# Altium PCB OnePhaseController.PcbDoc
Units mm, origin at the board's own origin, x right, y up, seen from the top; angles counter-clockwise.
Board outline 93 x 87.5 mm, 2 copper layers (Top Layer, Bottom Layer); 58 components, 35 nets, 154 pads, 21 vias.
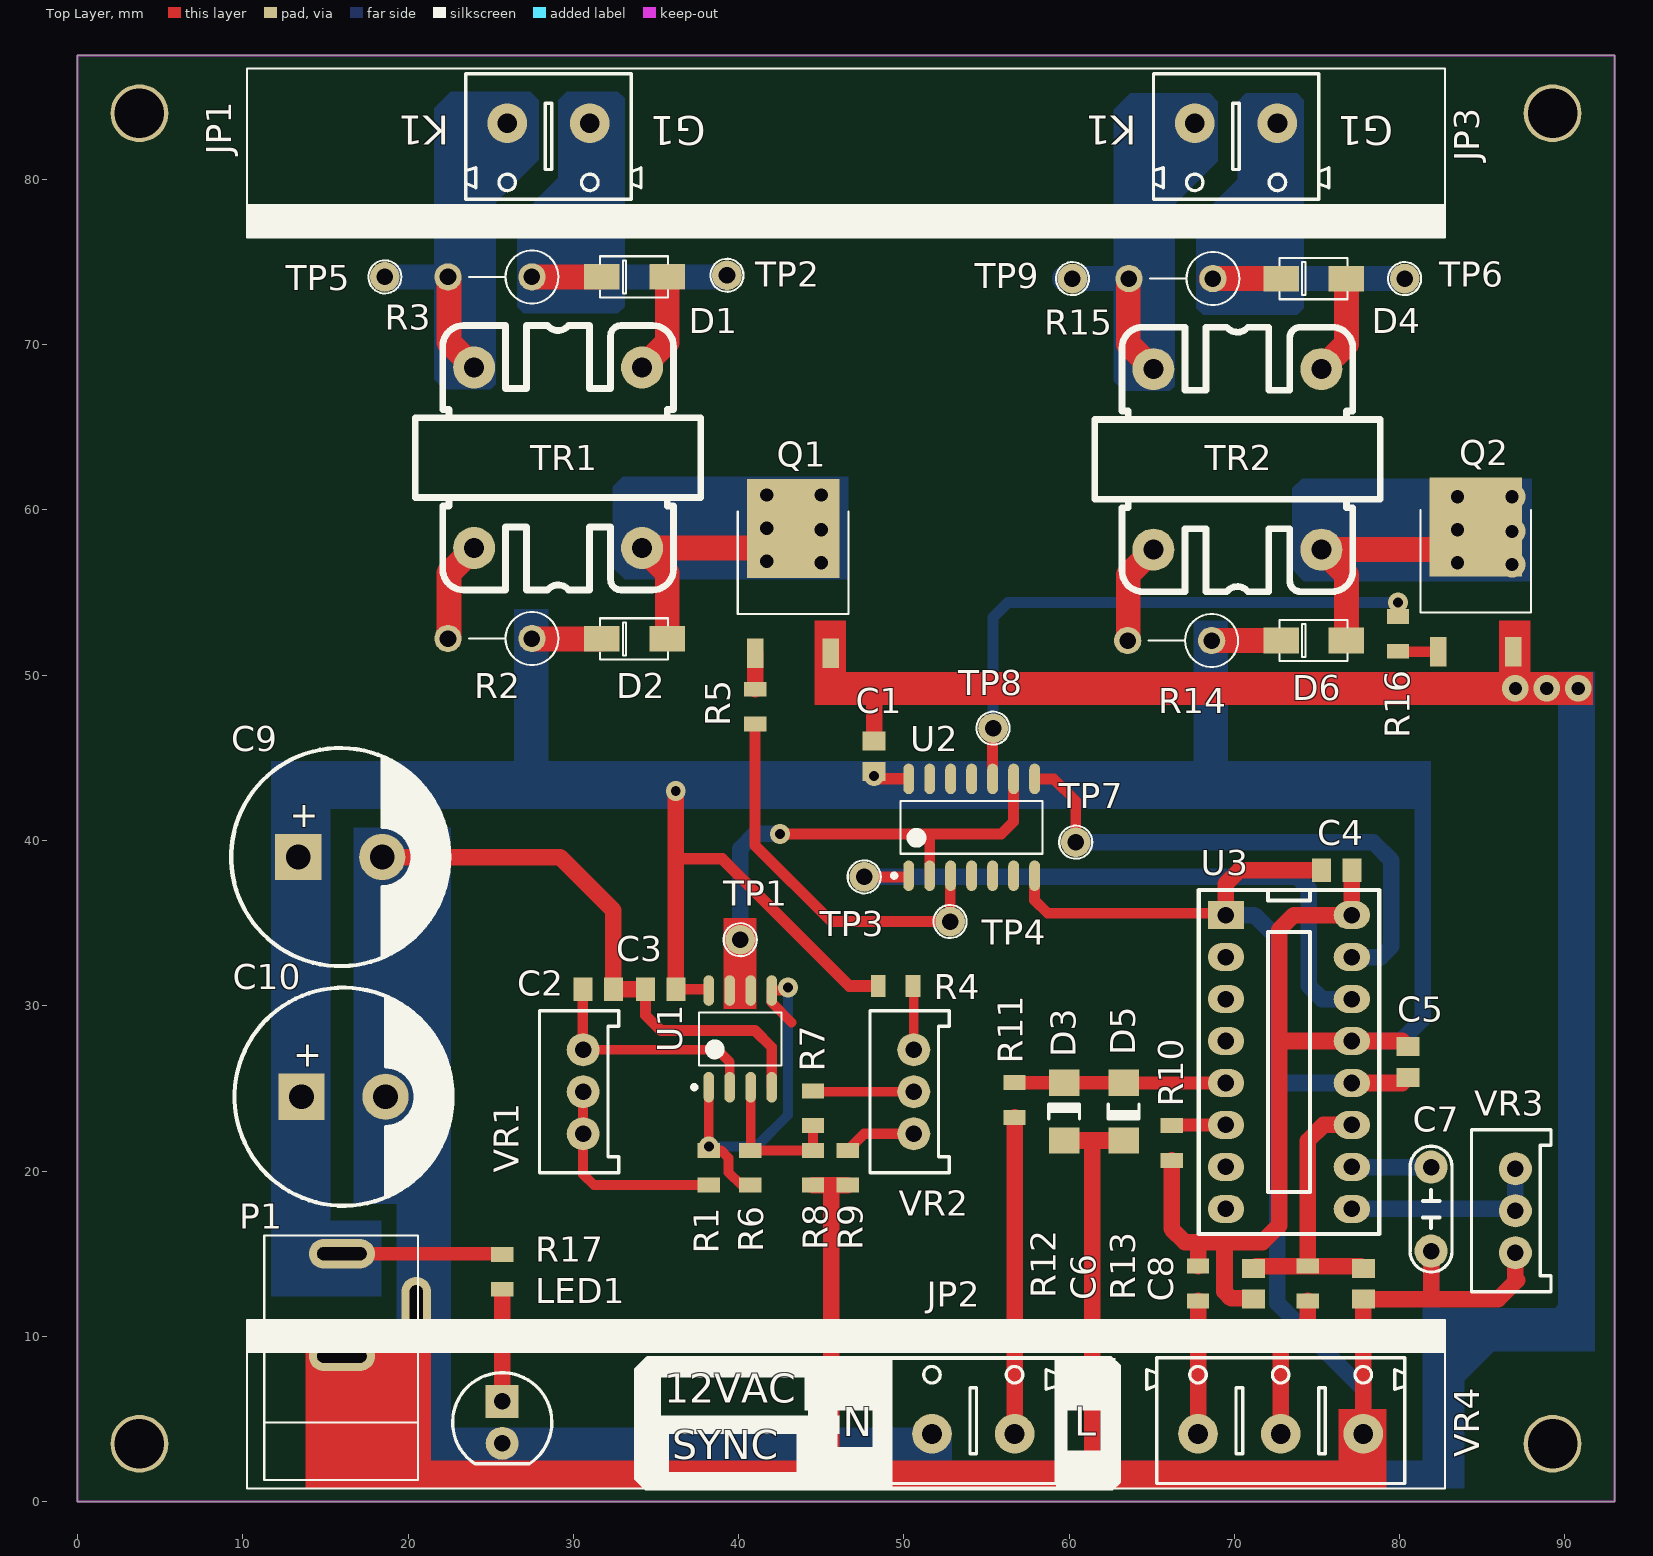
[diagram p0: Top Layer view]
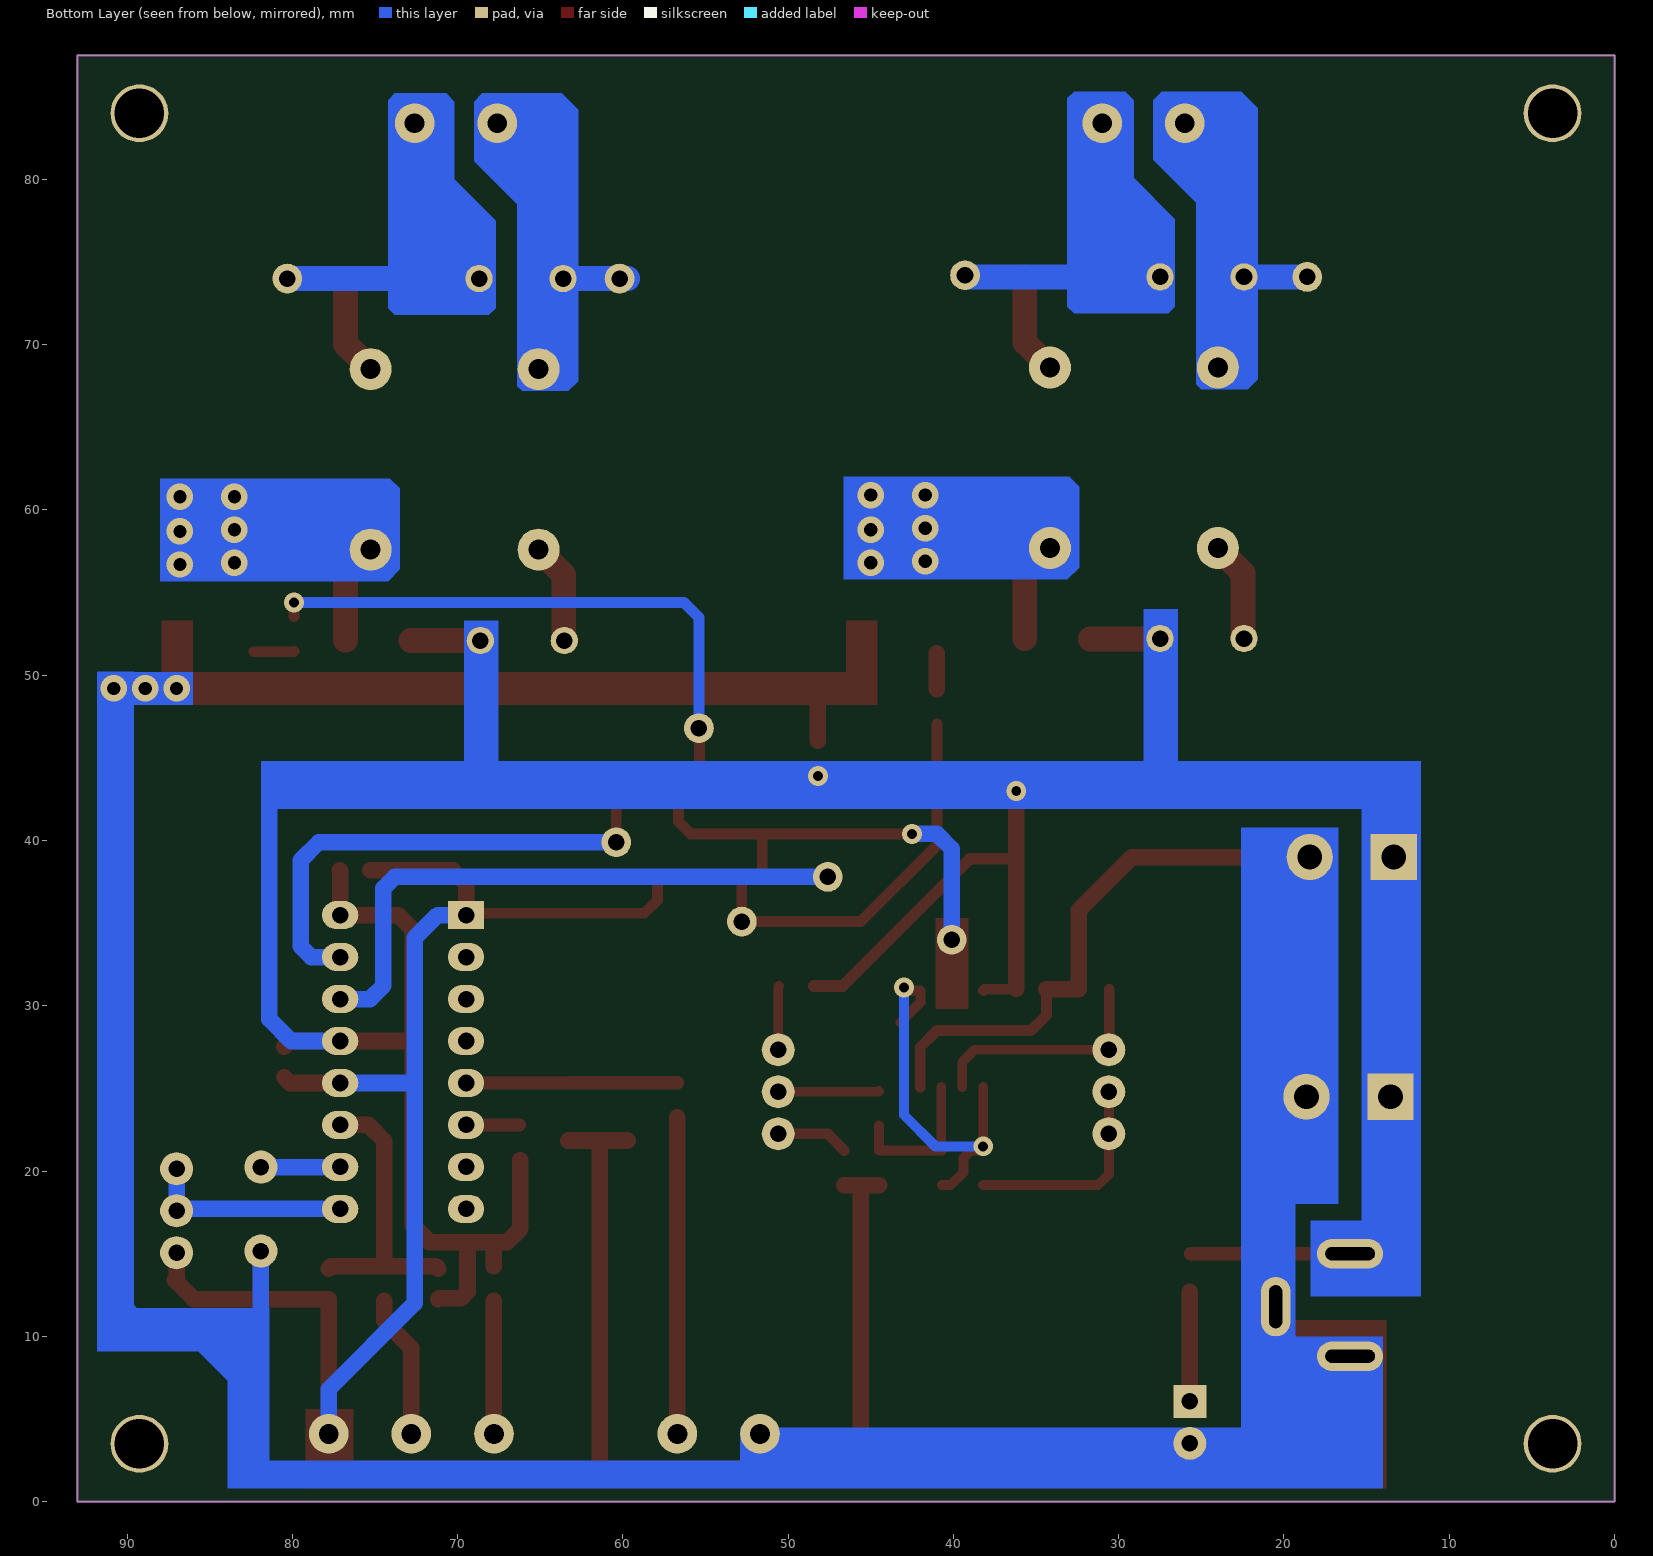
[diagram p1: Bottom Layer view, seen from below]
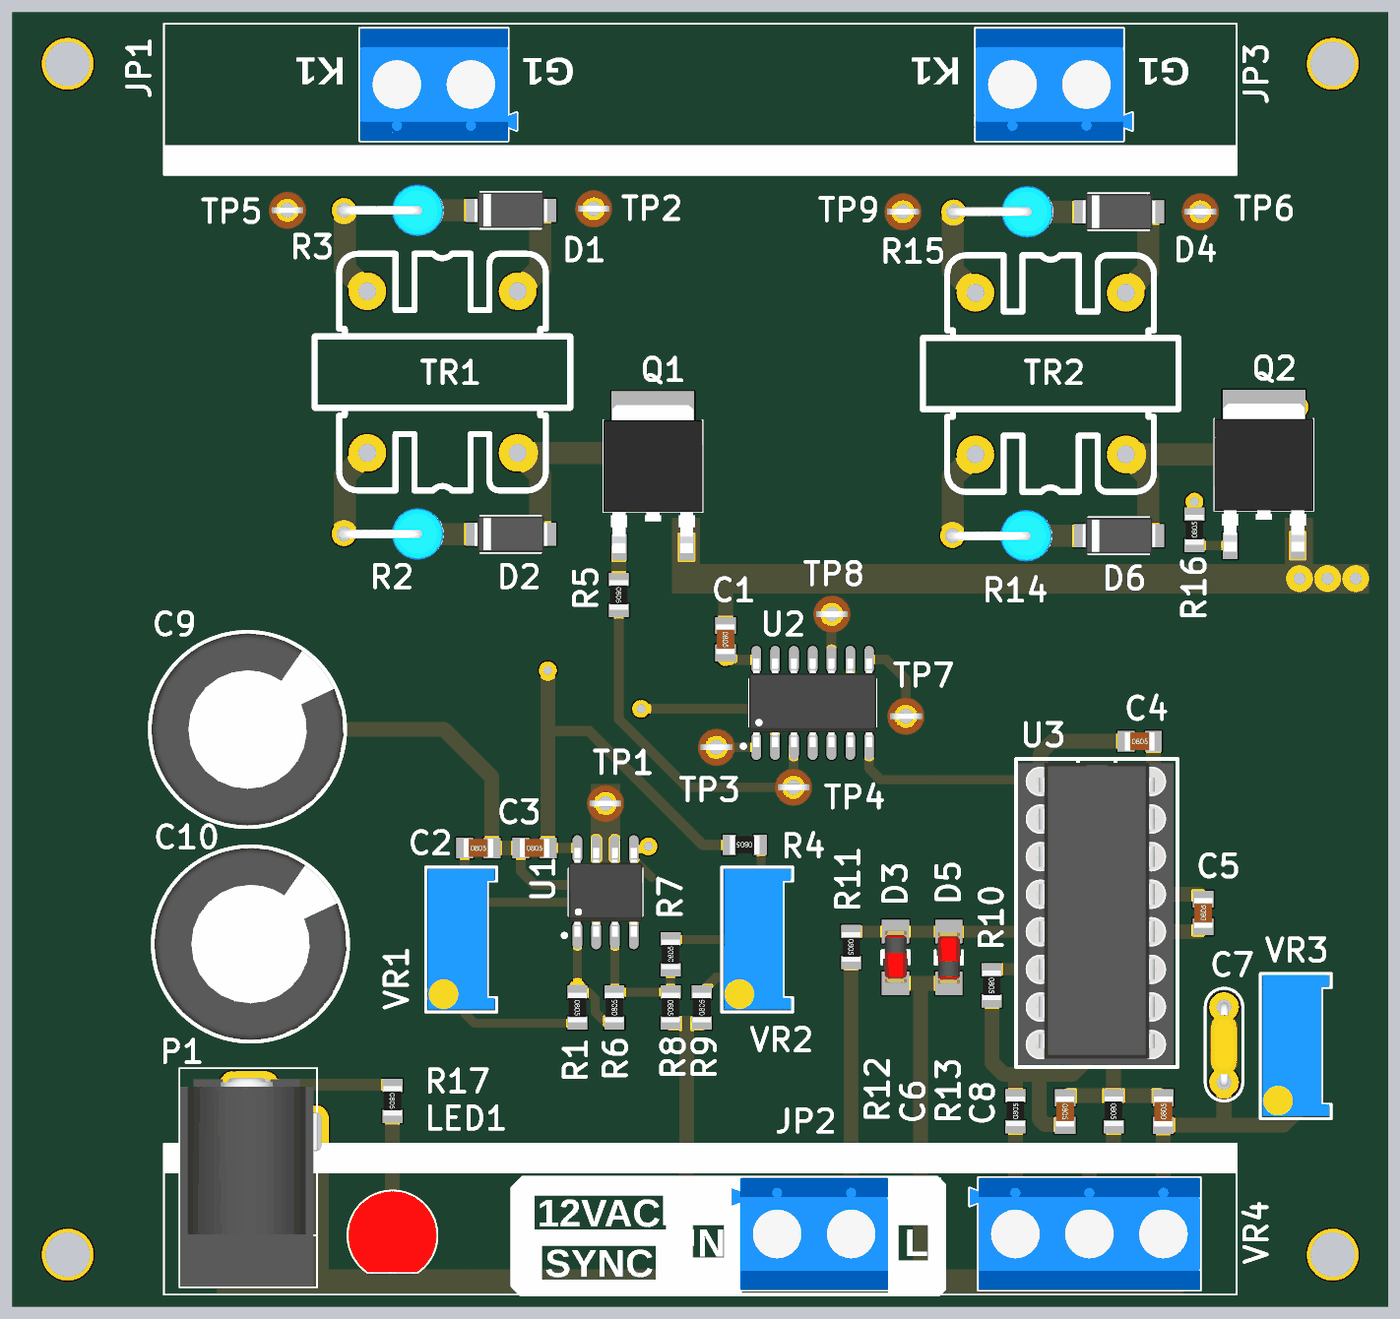
[diagram p2: 3D render of the assembled board from above, using the file's embedded part models]

## Layer stack, top to bottom
Top Solder: solder mask 0.0102, Solder Resist, Dk 3.5
Top Layer: signal copper 0.0356
Dielectric1: dielectric 0.32, FR-4, Dk 4.8
Bottom Layer: signal copper 0.0356
Bottom Solder: solder mask 0.0102, Solder Resist, Dk 3.5

## Board outline
0,0 93,0 93,87.5 0,87.5

## Design rules (kind name [scope] priority, off if disabled: settings)
Clearance [All] p1: gap=0.3 ignorepadtopadclearanceinfootprint=FALSE except(0: Arc-Hole Track-Hole SMDPad-Hole THPad-Hole Via-Hole Fill-Hole Poly-Hole Region-Hole Text-Hole)
PolygonConnect [All] p1: connectstyle=Relief reliefconductorwidth=0.254 reliefentries=4 polygonreliefangle="90 Angle" airgapwidth=0.254
RoutingVias [All] p1: holewidth=0.6 width=1.2 viastyle="Through Hole" minholewidth=0.6 minwidth=1.2 maxholewidth=0.6 maxwidth=1.2
SolderMaskExpansion [All] p1: expansion=0.102
Width [All] p1: maxlimit=2 minlimit=0.4 preferedwidth=1
30 further rules are at their usual default settings.

## Components (designator, comment, footprint, x,y, rotation, side; value= is the part's Value field where it differs from the comment)
C1 "104" C-0805 48.2,45.1 r270 top
C2 "104" C-0805 31.5,31 r0 top
C3 "104" C-0805 35.3,31 r0 top
C4 "104" C-0805 76.2,38.2 r0 top
C5 "104" C-0805 80.5,26.6 r90 top
C6 "104" C-0805 71.16,13.175 r270 top
C7 "473" C-200 81.9,17.7 r270 top
C8 "104" C-0805 77.8,13.175 r90 top
C9 "1000uF/25V" C-13x25mm 15.9,39 r0 top
C10 "1000uF/25V" C-13x25mm 16.1,24.5 r0 top
D1 "FR107" D-DO214-AC(SMA) 33.7,74.1 r180 top
D2 "FR107" D-DO214-AC(SMA) 33.7,52.2 r180 top
D3 "1N4148" D-SOD-80 59.7,23.6 r90 top
D4 "FR107" D-DO214-AC(SMA) 74.8,74 r180 top
D5 "1N4148" D-SOD-80 63.3,23.6 r270 top
D6 "FR107" D-DO214-AC(SMA) 74.8,52.1 r180 top
JP1 "KF301" TER-KF301-2 28.5,83.4 r180 top
JP2 "KF301" TER-KF301-2 54.2,4.1 r0 top
JP3 "KF301" TER-KF301-2 70.1,83.4 r180 top
LED1 "RED" LED-D5-2A 25.7,4.8 r270 top
P1 "JackDC" TER-JACKDC-5.5x2.1mm 16,8.8 r90 top
Q1 "J122G" TO-252-3 43.3,55.1 r90 top
Q2 "J122G" TO-252-3 84.6,55.2 r90 top
R1 "1K5" R-0805 38.2,20.2 r270 top
R2 "47R/1W" R-1W-P200mil 27.5,52.222 r180 top
R3 "2K2/1W" R-1W-P200mil 27.5,74.1 r180 top
R4 "10K" R-0805 49.5,31.2 r180 top
R5 "1K" R-0805 41,48.1 r270 top
R6 "47K" R-0805 40.7,20.2 r90 top
R7 "10K" R-0805 44.5,23.8 r90 top
R8 "47K" R-0805 44.5,20.2 r270 top
R9 "10K" R-0805 46.6,20.2 r90 top
R10 "10K" R-0805 66.2,21.7 r270 top
R11 "22K" R-0805 56.7,24.3 r270 top
R12 "47R" R-0805 67.8,13.2 r90 top
R13 "47R" R-0805 74.44,13.2 r270 top
R14 "47R/1W" R-1W-P200mil 68.622,52.1 r180 top
R15 "2K2/1W" R-1W-P200mil 68.7,74 r180 top
R16 "1K" R-0805 79.9,52.5 r90 top
R17 "2K2" R-0805 25.7,13.9 r270 top
TP1 "Testpoint" TP1A 40.1,34 r0 top
TP2 "Testpoint" TP1A 39.3,74.2 r0 top
TP3 "Testpoint" TP1A 47.6,37.8 r0 top
TP4 "Testpoint" TP1A 52.8,35.1 r0 top
TP5 "Testpoint" TP1A 18.6,74.1 r0 top
TP6 "Testpoint" TP1A 80.3,74 r0 top
TP7 "Testpoint" TP1A 60.4,39.9 r0 top
TP8 "Testpoint" TP1A 55.4,46.8 r0 top
TP9 "Testpoint" TP1A 60.2,74 r0 top
TR1 "BIENAPCACHLY" TRANS-DRIVER-THYR 24,57.7 r90 top
TR2 "BIENAPCACHLY" TRANS-DRIVER-THYR 65.1,57.6 r90 top
U1 "LM358N" SOP-8 40.1,28 r90 top
U2 "HCF4081BM1" SOP-14 54.1,40.8 r90 top
U3 "TCA875" SK-DIP16-300 73.3,26.6 r270 top
VR1 "20K" VR-3296W 30.6,24.8 r90 top
VR2 "100K" VR-3296W 50.6,24.8 r90 top
VR3 "500K" VR-3296W 87,17.6 r90 top
VR4 "100K" TER-KF301-3 72.8,4.1 r0 top

## Footprints (in the part's own frame and the unit in brackets; to place one, negate y for a bottom-side part, rotate by r counter-clockwise, add the part's x,y. Pads: shape width x height; smd on the part's side, far side on the other; paste and mask are expansions set on the pad)
C-13x25mm [mm] "D = 13.2mm  Pin to Pin 200"
  rect 2.8x2.8 hole 1.5: 1(-2.54,0)
  round 2.8 hole 1.5: 2(2.54,0)
  silkscreen extent -6.6,-6.6 6.7,6.6, body extent -6.49,-6.5 6.49,6.5, height 27
C-200 [mm] "P2P = 200mil, 100nF (104)"
  round 2 hole 1: 1(-2.54,0) 2(2.54,0)
  silkscreen extent -3.81,-1.27 3.81,1.27, body extent -2.84,-0.9 2.84,0.9, height 4.48
C-0805 [mm] "Chip Capacitor, 2-Leads, Body 2.0x1.3mm, IPC Medium Density"
  rect 1.15x1.4 smd: 1(-0.925,0) 2(0.925,0)
  body extent -1,-0.63 1,0.63, height 0.5
D-DO214-AC(SMA) [mm] "Molded Diode, 2-Leads, Body 4.3x2.6mm, IPC Medium Density"
  rect 2.15x1.55 smd: 1(-1.979,0) 2(1.979,0)
  silkscreen extent -2.04,-1.25 2.07,1.25, body extent -2.46,-1.2 2.46,1.2, height 2.45
D-SOD-80 [mm] "LL4148 (1N4148)"
  rect 1.6x1.85 smd: 1(-1.75,0) 2(1.75,0)
  silkscreen extent -0.45,-0.93 0.45,0.92, body extent -1.71,-0.76 1.79,0.74, height 1.5
LED-D5-2A [mm] "D trong = 5mm, D ngoai = 6mm"
  rect 2x2 hole 1: 1(-1.27,0)
  round 2 hole 1: 2(1.27,0)
  silkscreen extent -3,-3 2.5,3, body extent -3,-3 2.5,3, height 13.44
R-1W-P200mil [mm] "RES-1W-PITCH-200MIL"
  round 1.65 hole 1: 1(0,0) 2(5.08,0)
  silkscreen extent -1.6,-1.6 3.81,1.6, body extent -1.65,-1.75 5.48,1.75, height 13.25
R-0805 [mm] "Chip Resistor, 2-Leads, Body 2.0x1.3mm, IPC Medium Density"
  rect 0.9x1.35 smd: 1(-1.05,0) 2(1.05,0)
  body extent -1,-0.63 1,0.63, height 0.5
SK-DIP16-300 [mm] "Length 750mil - Width 320mil"
  rect 1.7x2.2 hole 1: 1(-8.89,-3.81)
  oval 1.7x2.2 hole 1: 2(-6.35,-3.81) 3(-3.81,-3.81) 4(-1.27,-3.81) 5(1.27,-3.81) 6(3.81,-3.81) 7(6.35,-3.81) 8(8.89,-3.81) 9(8.89,3.81) 10(6.35,3.81) 11(3.81,3.81) 12(1.27,3.81) 13(-1.27,3.81) 14(-3.81,3.81) 15(-6.35,3.81) 16(-8.89,3.81)
  silkscreen extent -10.41,-5.46 10.41,5.46, body extent -10.16,-5.31 10.25,5.19, height 8.06
SOP-8 [mm] "SOP, 8-Leads, Body 4.90x3.90mm, Pitch 1.27mm, IPC Low Density"
  oval 1.85x0.65 smd: 1(-2.925,1.905) 2(-2.925,0.635) 3(-2.925,-0.635) 4(-2.925,-1.905) 5(2.925,-1.905) 6(2.925,-0.635) 7(2.925,0.635) 8(2.925,1.905)
  silkscreen extent -3.05,-2.5 1.6,2.9, body extent -3,-2.5 3,2.5, height 1.75
SOP-14 [mm] "SOP, 14-Leads, Body 8.65x3.90mm, Pitch 1.27mm, IPC Low Density"
  oval 1.85x0.65 smd: 1(-2.925,3.81) 2(-2.925,2.54) 3(-2.925,1.27) 4(-2.925,0) 5(-2.925,-1.27) 6(-2.925,-2.54) 7(-2.925,-3.81) 8(2.925,-3.81) 9(2.925,-2.54) 10(2.925,-1.27) 11(2.925,0) 12(2.925,1.27) 13(2.925,2.54) 14(2.925,3.81)
  silkscreen extent -3.05,-4.3 1.6,4.81, body extent -3,-4.3 3,4.3, height 1.75
TER-JACKDC-5.5x2.1mm [mm] "JACKDC-5.5x2.1mm"
  oval 1.8x4 hole 0.8 slot 3 at 90 deg: 1(6.2,0) 3(0,0)
  oval 3.6x1.8 hole 0.8 slot 2.6 at 0 deg: 2(3,-4.5)
  silkscreen extent -7.5,-4.6 7.3,4.7, body extent -7.43,-4.65 6.67,4.65, height 11.9
TER-KF301-2 [mm] "http://banlinhkien.vn/goods-987-con-2-kf301-2p-5-08mm-200mil.html"
  round 2.4 hole 1.2: 1(-2.5,0) 2(2.5,0)
  silkscreen extent -5.6,-3 5,4.6, body extent -5.6,-3 5,4.6, height 10.1
TER-KF301-3 [mm] "http://banlinhkien.vn/goods-987-con-2-kf301-2p-5-08mm-200mil.html"
  round 2.4 hole 1.2: 1(-5,0) 2(0,0) 3(5,0)
  silkscreen extent -8.1,-3 7.5,4.6, body extent -8.1,-3 7.5,4.6, height 10.1
TO-252-3 [mm] "D-PAK, 3-Pads, Body 6.2x6.7mm (max), IPC Medium Density"
  rect 1.8x1 smd: 1(-3.771,2.28) 3(-3.771,-2.28)
  rect 6x5.6 smd: 2(3.771,0)
  silkscreen extent -1.4,-3.35 4.8,3.35, body extent -4.17,-3.35 5.83,3.35, height 2.55
TP1A [mm]
  round 1.8 hole 1: 1(0,0)
  silkscreen extent -1,-1 1,1, body extent -1.27,-1.27 1.27,1.27, height 5.09
TRANS-DRIVER-THYR [mm]
  round 2.54 hole 1.2: 1(0,0) 2(0,-10.16) 3(10.922,0) 4(10.922,-10.16)
  silkscreen extent -2.54,-13.72 13.46,3.56
VR-3296W [mm] "Bien tro nhieu vong  loai A"
  round 2 hole 1: 1(-2.54,0) 2(0,0) 3(2.54,0)
  silkscreen extent -4.9,-2.15 4.9,2.65, body extent -4.74,-2 4.76,2.5, height 11.4

## Part data
C1 C2 C3 C4 C5 C6 C7 C8: library part Cap, "Capacitor"
C9 C10: library part "Cap Pol1", "Polarized Capacitor (Radial)"
D1 D2 D3 D4 D5 D6: library part Diode, "Default Diode"
JP1 JP2 JP3: library part "Header 2", "Header, 2-Pin"
LED1: library part LED1, "Typical RED GaAs LED"
P1: "Low Voltage Power Supply Connector"
Q1 Q2: library part NPN1, "NPN Darlington Bipolar Transistor"
R1 R4 R5 R6 R7 R8 R9 R10 R11 R12 R13 R16 R17: library part Res1, "Resistor"
R2 R3 R14 R15: library part Res2, "Resistor"
TP1 TP2 TP3 TP4 TP5 TP6 TP7 TP8 TP9: library part TP1
U1: "Low-Power Dual Operational Amplifier"
U2: "Quad 2-Input AND-Gate"
U3: library part TCA785
VR1 VR2 VR3: library part VR
VR4: library part RPot2, "Potentiometer"

## Free pads (board coordinates)
  round 3.5 hole 3: 1(3.75,3.5) 1(3.75,84) 1(89.25,3.5) 1(89.25,84)

## Via types
v1: diameter 1.6, hole 0.8, Top Layer to Bottom Layer, 15 vias
v2: diameter 1.2, hole 0.6, Top Layer to Bottom Layer, 6 vias

## Nets (pads, with @x,y where several pads share a name; then routed paths per layer and width w, separated by ;. In a path a pad name is that pad's centre, name@x,y a point inside that pad or via, vN(x,y) a via of type N, cw(c..) or ccw(c..) an arc to the next point about the centre after c; other vN are vias at no path point)
+15V: C1.2 C3.2 C4.2 C5.2 C6.2 C9.1 C10.1 D2.2 D6.2 P1.1 R2.1 R4.2 R10.2 R12.2 R14.1 R17.1 U1.8 U2.14 U3.13 U3.16 | length 119.6
  Top Layer w0.65: C3.2@36.2,31.025 C3.2 38.12,31 U1.8 ; U3.13@76.78,28.2 U3.13
  Top Layer w0.7: 36.2,38.9 39,38.9 46.7,31.2 R4.2 ; C1.2@48.2,43.725 U2.14@50.2,43.725
  Top Layer w0.8: P1.1 R17.1@25.65,15
  Top Layer w1: C3.2@36.2,31.025 36.2,38.9 v2(36.2,43) ; R10.2 66.2,16.5 67,15.7 67.8,15.7 ; R12.2 67.8,15.7 ; C6.2 71.11,12.3 69.8,12.3 69.4,12.7 69.4,15.7 ; C4.2 77.11,38.185 U3.16 73.59,35.49 72.7,34.6 72.7,27.87 ; C5.2 80.155,27.87 U3.13 72.7,27.87 ; 67.8,15.7 69.4,15.7 ; 69.4,15.7 71.7,15.7 72.7,16.7 72.7,27.87
  Top Layer w1.5: R2.1 27.522,52.2 D2.2 ; R14.1@68.6,52.122 R14.1 D6.2
  Bottom Layer w1: U3.13 80.07,27.87 81.4,29.2 81.4,42.8
  other v2: 48.2,43.9
G1: D1.2 JP1.1 R3.1 TP2.1 | length 16.1
  Top Layer w1.5: R3.1 D1.2
  Bottom Layer w1.5: R3.1 39.2,74.1 TP2.1
G2: D4.2 JP3.1 R15.1 TP6.1 | length 16.1
  Top Layer w1.5: R15.1@68.6,74 D4.2
  Bottom Layer w1.5: R15.1@68.6,74 TP6.1 TP6.1@80.4,74.1
GND: C1.1 C2.2 C3.1 C4.1 C5.1 C7.2 C8.1 C9.2 C10.2 D3.1 D5.2 JP2.1 LED1.2 P1.2 P1.3 Q1.3 Q2.3 R8.2 R9.1 U1.4 U2.7 U3.1 U3.12 VR3.1 VR4.3 | length 182.5
  Top Layer w0.65: C3.1 34.375,29.425 35.3,28.5 41,28.5 42.005,27.495 U1.4 ; U2.7 57.91,36.39 58.7,35.6 69.38,35.6 U3.1
  Top Layer w1: C9.2 29.2,39 32.425,35.775 C2.2 C3.1 ; R8.2 45.6,19.15 ; 45.6,1.8 45.6,19.15 ; R9.1 45.6,19.15 ; 48.1,49.1 48.2,49 C1.1 ; D3.1 61.4,21.85 ; 61.4,1.6 61.4,21.85 ; D5.2 61.4,21.85 ; U3.1 69.49,37.39 70.3,38.2 C4.1 ; U3.12 80.155,25.33 C5.1 ; VR4.3 C8.1 81.9,12.25 ; C7.2@81.9,15.06 81.9,12.25 ; VR3.1 87,13.5 87.1,13.4 85.95,12.25 81.9,12.25
  Bottom Layer w1: U3.1 71.21,35.49 72.6,34.1 72.6,12 77.8,6.8 VR4.3 ; 72.6,25.33 U3.12 ; 81.8,1.4 81.9,1.5 C7.2
  other v1: 87,49.2 88.9,49.2 90.8,49.2
K1: JP1.2 R3.2 TP5.1 TR1.3 | length 9.9
  Top Layer w1.5: R3.2@22.481,74.1 22.481,70.141 TR1.3
  Bottom Layer w1.5: TP5.1 R3.2
K2: JP3.2 R15.2 TP9.1 TR2.3 | length 9.9
  Top Layer w1.5: R15.2@63.581,74 63.581,70.041 TR2.3
  Bottom Layer w1.5: TP9.1@59.7,74 R15.2@63.52,74
NetC2_1: C2.1 U1.2 VR1.3 | length 14.2
  Top Layer w0.6: VR1.3 38.725,27.34 39.465,26.6 U1.2
  Top Layer w0.65: C2.1 30.575,27.865 VR1.3@30.85,27.59
NetC7_1: C7.1 U3.10 | length 4.8
  Bottom Layer w1: U3.10 77.12,20.24 C7.1
NetD1_1: D1.1 TR1.4 | length 6.1
  Top Layer w1.5: TR1.4 35.679,70.141 D1.1
NetD2_1: D2.1 Q1.2 TR1.2 | length 15.7
  Top Layer w1.5: D2.1@35.679,52.222 35.679,56.181 TR1.2 42.129,57.7 Q1.2
  other v1: 45,56.8 41.7,56.9 45,58.8 41.7,58.9 41.7,60.9 45,60.9
NetD3_2: D3.2 D5.1 R11.1 U3.5 | length 12.8
  Top Layer w0.8: R11.1 D3.2 D5.1 63.32,25.33 U3.5
NetD4_1: D4.1 TR2.4 | length 6.1
  Top Layer w1.5: TR2.4 76.779,70.041 D4.1
NetD6_1: D6.1 Q2.2 TR2.2 | length 13.4
  Top Layer w1.5: D6.1@76.779,52.122 76.779,56.081 TR2.2 Q2.2@82.529,57.6
  other v1: 86.8,56.7 83.5,56.8 86.8,58.7 83.5,58.8 83.5,60.8 86.8,60.8
NetJP2_2: JP2.2 R11.2 | length 19.2
  Top Layer w1: JP2.2 R11.2
NetLED1_1: LED1.1 R17.2 | length 6.6
  Top Layer w1: LED1.1 R17.2@25.7,12.7
NetQ1_1: Q1.1 R5.1 | length 2.2
  Top Layer w1: R5.1 41,51.309 Q1.1
NetQ2_1: Q2.1 R16.1 | length 2.4
  Top Layer w0.65: R16.1 79.921,51.429 Q2.1
NetR1_1: R1.1 R6.1 U1.1 U1.5 | length 24.4
  Top Layer w0.6: U1.1 38.195,21.255 R1.1 38.95,21.25 39.4,20.8 39.4,19.924 40.174,19.15 R6.1 ; v2@43,30.925 U1.5 42.005,30.195 43.2,29
  Bottom Layer w0.6: v2(38.2,21.5) 41.1,21.5 43,23.4 v2(43,31.1)
NetR1_2: R1.2 VR1.1 VR1.2 | length 12.9
  Top Layer w0.6: VR1.2 VR1.1 30.6,19.8 31.25,19.15 R1.2
NetR2_2: R2.2 TR1.1 | length 6.1
  Top Layer w1.5: R2.2@22.481,52.222 22.481,56.181 TR1.1
NetR4_1: R4.1 VR2.3 | length 3.9
  Top Layer w0.6: R4.1 50.6,31.15 VR2.3
NetR5_2: R5.2 TP4.1 U2.3 | length 23.8
  Top Layer w0.65: R5.2 41,39.7 45.6,35.1 TP4.1 52.8,37.845 U2.3
NetR6_2: R6.2 R7.1 R8.1 U1.3 | length 9.1
  Top Layer w0.6: U1.3 40.735,21.285 R6.2 R8.1 R7.1
NetR7_2: R7.2 VR2.2 | length 6
  Top Layer w0.6: R7.2 R7.2@44.55,24.8 ; R7.2@44.65,24.8 VR2.2
NetR9_2: R9.2 VR2.1 | length 4.4
  Top Layer w0.65: R9.2 47.61,22.26 VR2.1
NetR10_1: R10.1 U3.6 | length 3.2
  Top Layer w0.8: R10.1@66.26,22.79 U3.6
NetR12_1: R12.1 VR4.1 | length 8.1
  Top Layer w1: VR4.1 R12.1
NetR13_2: R13.2 VR4.2 | length 8.7
  Top Layer w1: VR4.2 72.8,9.3 74.44,10.94 R13.2
NetR14_2: R14.2 TR2.1 | length 6.1
  Top Layer w1.5: R14.2@63.581,52.122 63.581,56.081 TR2.1
NetR16_2: R16.2 TP8.1 U2.10 | length 35.5
  Top Layer w0.65: U2.10 55.37,46.77 TP8.1 ; R16.2 v2(79.9,54.4)
  Bottom Layer w0.65: TP8.1 55.4,53.5 56.3,54.4 v2(79.9,54.4)
NetU3_9: U3.9 VR3.2 VR3.3 | length 12.5
  Bottom Layer w1: U3.9 86.89,17.71 VR3.2 VR3.3
PULSE: TP1.1 U1.6 U1.7 U2.2 U2.9 | length 27.8
  Top Layer w0.65: v2(42.5,40.4) 55.9,40.4 56.64,41.14 U2.9 ; U2.2 51.56,40.4
  Bottom Layer w1: TP1.1 40.1,39.5 41,40.4 v2(42.5,40.4)
V11: C6.1 C8.2 R13.1 U3.11 | length 17.4
  Top Layer w1: C6.1 71.31,14.25 R13.1 ; U3.11 75.39,22.79 74.44,21.84 R13.1 ; C8.2 77.65,14.25 R13.1
VC1: TP3.1 U2.1 U3.14 | length 38.8
  Top Layer w0.65: TP3.1 50.215,37.8 U2.1
  Bottom Layer w1: TP3.1 73.8,37.8 74.5,37.1 74.5,31.2 75.29,30.41 U3.14 U3.14@77.12,30.4
VC2: TP7.1 U2.8 U3.15 | length 33
  Top Layer w0.65: U2.8 59.075,43.725 60.4,42.4 TP7.1
  Bottom Layer w1: TP7.1 78.4,39.9 79.5,38.8 79.5,33.6 78.85,32.95 U3.15 U3.15@77.16,33
pads on no net: U2.4 U2.5 U2.6 U2.11 U2.12 U2.13 U3.2 U3.3 U3.4 U3.7 U3.8

## Keep-outs
Keep-Out Layer:
  the board outline again, w0.127

## Other copper
Top Layer:
  rectangle net PULSE: 39.1,29.8 41.1,35.3
  rectangle net GND: 44.7,48.2 91.7,50.2
  rectangle net GND: 44.6,48.2 46.5,53.3
  rectangle net GND: 86,48.2 87.9,53.3
  rectangle net GND: 13.8,0.8 79.2,2.5
  rectangle net GND: 13.8,0.8 21.4,11
  rectangle net GND: 76.3,0.8 79.2,5.6
Bottom Layer:
  rectangle net +15V: 11.7,12.4 15.3,44.8
  rectangle net GND: 16.7,18 22.6,40.8
  rectangle net GND: 19.3,2.5 22.6,19.3
  rectangle net +15V: 13,12.4 18.4,17
  rectangle net GND: 14,0.8 52.9,4.5
  rectangle net GND: 48.8,0.8 82.7,2.5
  rectangle net +15V: 11.7,41.9 81.9,44.8
  rectangle net +15V: 26.4,42 28.5,54
  rectangle net +15V: 67.522,42 69.622,53.3
  rectangle net GND: 86,48.2 91.7,50.2
  rectangle net GND: 14,3.8 20.4,10
  region net K1: 25.3,78.6 27.9,81.2 27.9,84.8 27.4,85.3 22.6,85.3 21.6,84.3 21.6,67.9 22.2,67.3 25,67.3 25.3,67.6
  region net G1: 29.6,85.3 29.1,84.8 29.1,80.1 26.6,77.6 26.6,72.3 27,71.9 32.7,71.9 33.1,72.3 33.1,84.9 32.7,85.3
  region net NetD2_1: 46.65,62 33,62 32.4,61.4 32.4,56.5 33.1,55.8 46.65,55.8
  region net GND: 83.9,0.8 83.9,7.3 85.7,9.1 91.8,9.1 91.8,50.2 89.6,50.2 89.6,11.9 89.4,11.7 81.4,11.7 81.4,0.8
  region net NetD6_1: 88,61.9 74.1,61.9 73.5,61.3 73.5,56.4 74.2,55.7 88,55.7
  region net G2: 70.7,85.2 70.2,84.7 70.2,80 67.7,77.5 67.7,72.2 68.1,71.8 73.8,71.8 74.2,72.2 74.2,84.8 73.8,85.2
  region net K2: 66.4,78.5 69,81.1 69,84.7 68.5,85.2 63.7,85.2 62.7,84.2 62.7,67.8 63.3,67.2 66.1,67.2 66.4,67.5

## Silkscreen, mask and mechanical layers (free items; w line width, h text height)
Top Overlay:
  rectangle: 10.25,9 82.75,11
  rectangle: 10.25,76.5 82.75,78.5
  rectangle: 34.8,7.5 49.1,8.7
  rectangle: 44,5.5 49.2,7.8
  rectangle: 35.2,4.1 46.1,5.2
  rectangle: 35.2,0.8 49.3,1.8
  rectangle: 48.1,0.8 49.2,6
  rectangle: 44.2,1.1 46,6.2
  rectangle: 43.5,1.3 44.4,4.5
  rectangle: 34.7,1.3 35.8,4.8
  rectangle: 45.6,1.3 48.4,3.3
  rectangle: 59.2,5.5 62.8,8.7
  rectangle: 59.2,0.8 62,3.1
  rectangle: 59.2,2.9 59.9,5.7
  region: 33.8,8 34.5,8.7 35.3,8.7 35.3,0.8 34.3,0.8 34.3,0.9 33.8,1.4
  region: 62.5,8.7 63,8.2 63,1.2 62.6,0.8 61.9,0.8 61.9,8.6 61.8,8.7
  lines w0.127: 10.25,0.8 82.75,0.8 82.75,11 10.25,11 10.25,0.8 ; 10.25,76.5 82.75,76.5 82.75,86.7 10.25,86.7 10.25,76.5
  lines w0.254: 33.8,1.4 34.4,0.8 62.6,0.8 63,1.2 63,8.2 62.5,8.7 34.5,8.7 33.8,8 33.8,1.4
  text "K1" at 22.5,84.435 h3 r180
  text "K1" at 64.1,84.435 h3 r180
  text "G1" at 38,84.4 h3 r180
  text "G1" at 79.6,84.4 h3 r180
  text "12VAC" at 35.5,5.4 h3
  text "N" at 46.3,3.382 h3
  text "L" at 60.3,3.4 h3
  text "SYNC" at 36,2 h3
Mechanical 1:
  circle w0.127: c3.75,84 r1.25
  circle w0.127: c89.25,84 r1.25
  circle w0.127: c89.25,3.5 r1.25
  circle w0.127: c3.75,3.5 r1.25
  lines w0.127: 10.25,0 10.25,87.5 ; 10.25,9 82.75,9 ; 10.25,11 82.75,11 ; 10.25,76.5 82.75,76.5 ; 10.25,78.5 82.75,78.5 ; 82.75,0 82.75,87.5 ; 0,0 0,87.5 93,87.5 93,0 0,0 ; 0.4,8.75 0.4,78.75 5.25,78.75 ccw(c5.25,81.75) 8.25,81.75 8.25,86.7 84.75,86.7 84.75,81.75 ccw(c87.75,81.75) 87.75,78.75 92.6,78.75 92.6,8.75 87.75,8.75 ccw(c87.75,5.75) 84.75,5.75 84.75,0.8 8.25,0.8 8.25,5.75 ccw(c5.25,5.75) 5.25,8.75 0.4,8.75
Mechanical 13:
  rectangle: 10.25,9 82.75,11
  rectangle: 10.25,76.5 82.75,78.5

## Text inside footprints (layer, text, board x,y; h text height)
C9: Top Overlay "+" at 12.85,40.8 h1.52
C10: Top Overlay "+" at 13.05,26.3 h1.52